# Altium PCB MCH_MAIN.PCBDOC (part 4 of 5)
Units mil, origin at the board's own origin, x right, y up, seen from the top; angles counter-clockwise.
Board outline 7194.88 x 2984.25 mil, 8 copper layers (Top Layer, MidLayer1, MidLayer2, GND, Power, MidLayer3, MidLayer4, Bottom Layer); 584 components, 952 nets, 3896 pads, 365 vias.
Unrouted connection lines stored in the file: 2112.
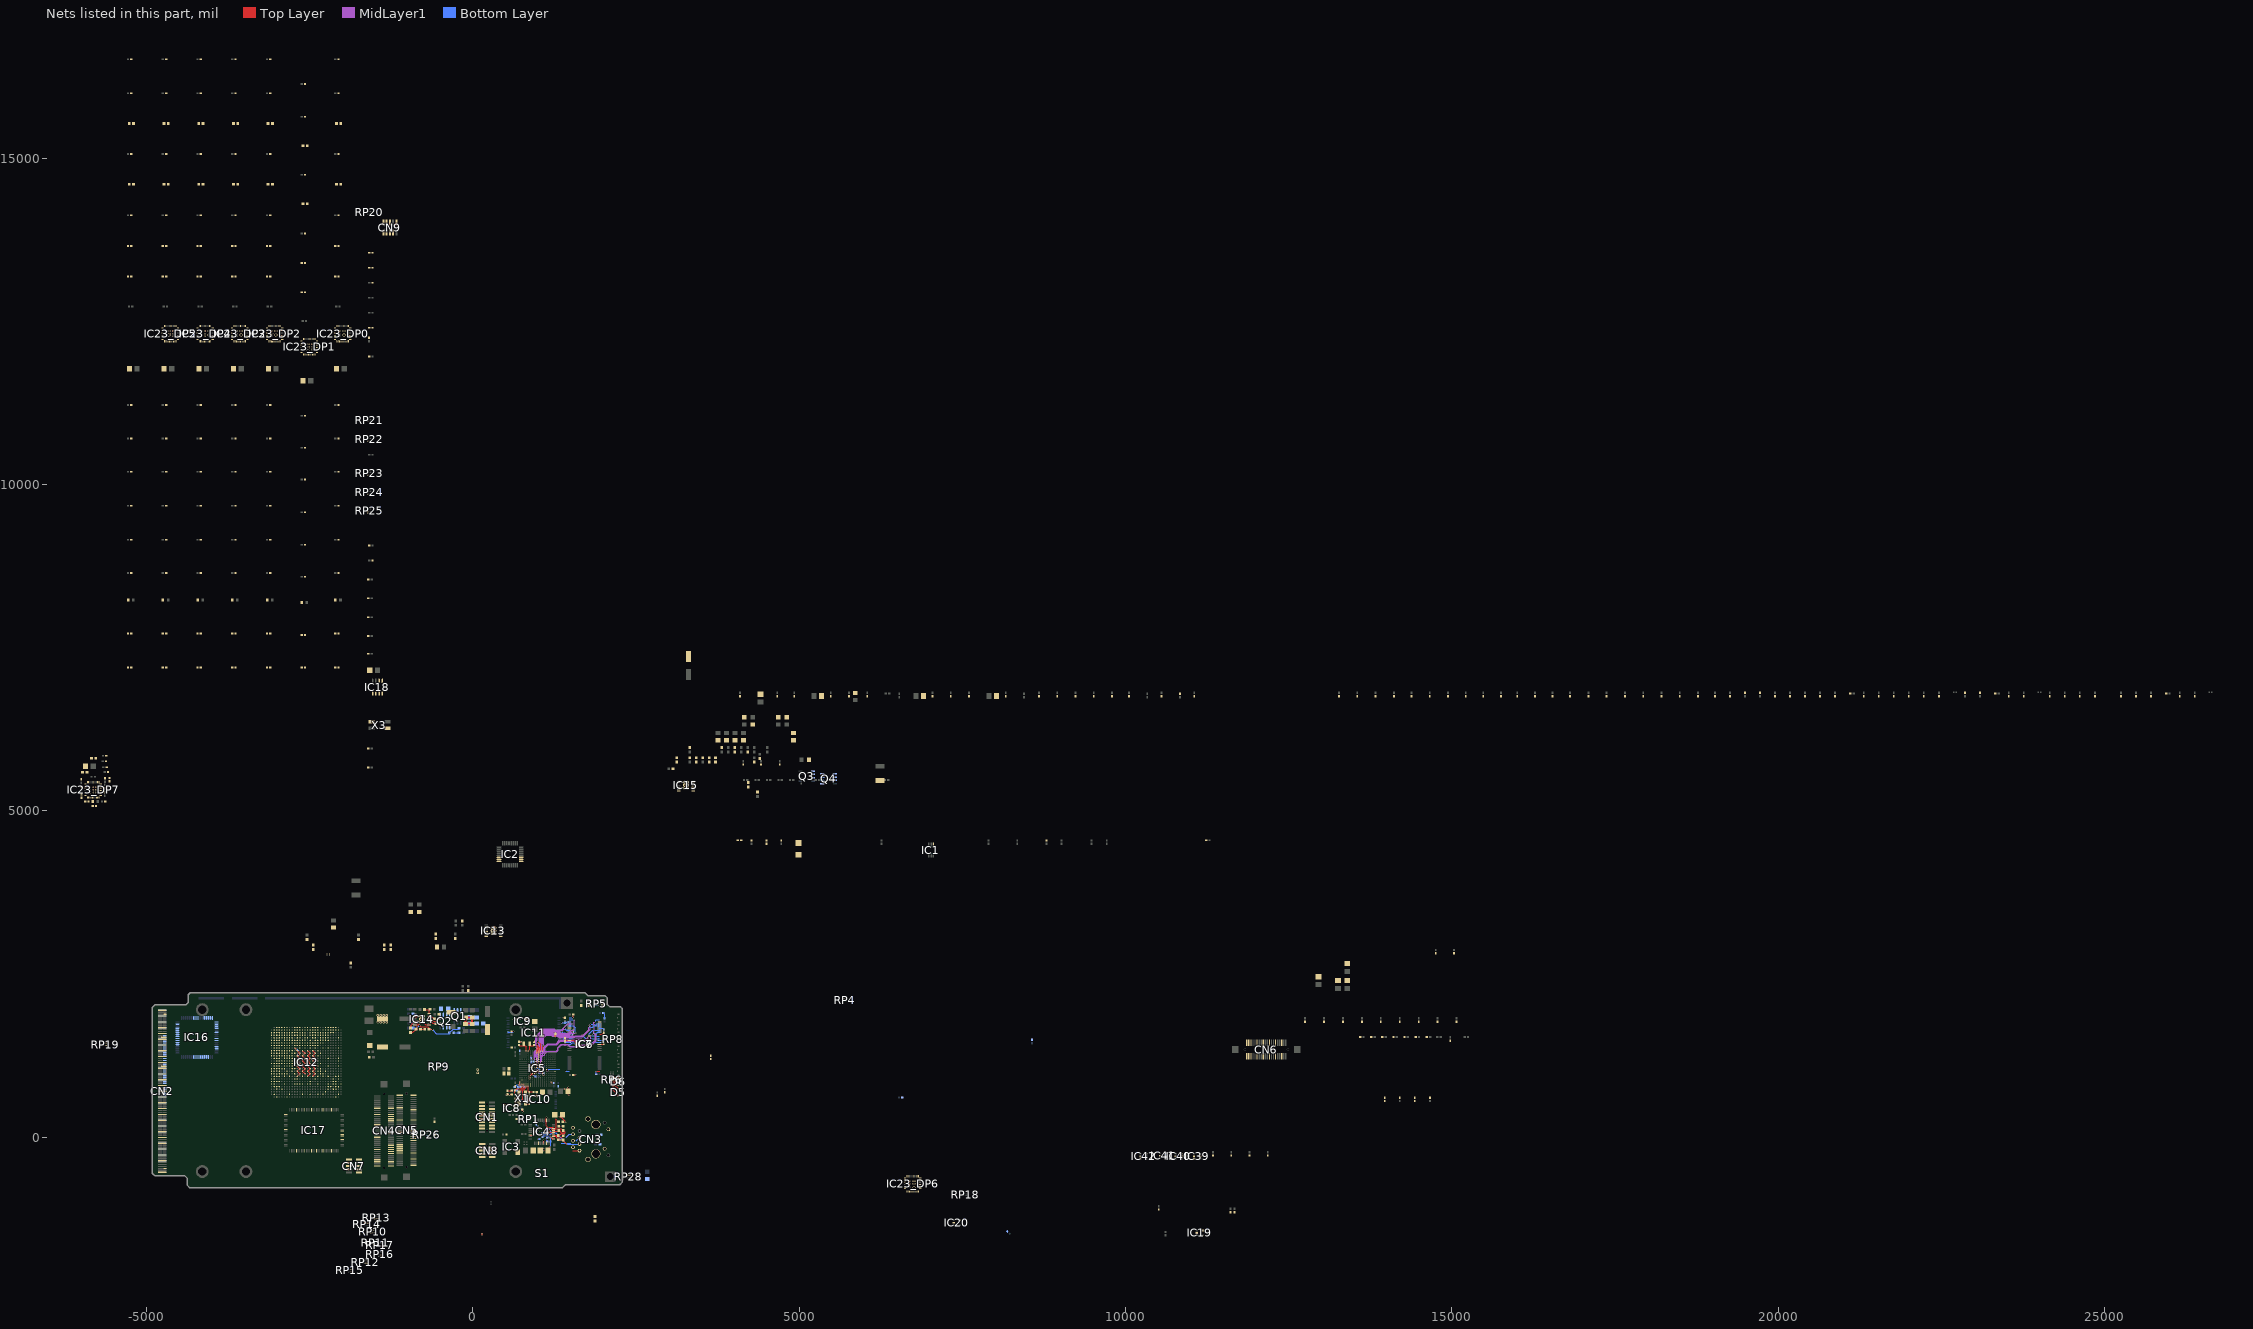
[diagram p7: the nets of this part, all layers, seen from the top]

## Via types
v1: diameter 24, hole 8, Top Layer to Bottom Layer, 183 vias
v2: diameter 18, hole 8, Top Layer to Bottom Layer, 150 vias
v3: diameter 40, hole 24, Top Layer to Bottom Layer, 24 vias
v4: diameter 26, hole 10, Top Layer to Bottom Layer, 8 vias

## Nets (pads, with @x,y where several pads share a name; then routed paths per layer and width w, separated by ;. In a path a pad name is that pad's centre, name@x,y a point inside that pad or via, vN(x,y) a via of type N, cw(c..) or ccw(c..) an arc to the next point about the centre after c; other vN are vias at no path point) (continued)
D16: IC5.H7 IC7.2 | length 1494.2
  Top Layer w8: IC5.H7@1038.37,1132.88 v2(1054.11,1148.63)
  MidLayer1 w5: v2(1054.11,1148.63) 1056.12,1150.63 1056.12,1233.97 1079.63,1257.48 1091.97,1257.48 1101.61,1267.11 1101.61,1281.03 1130.98,1310.41 1284.78,1310.41 1309.59,1335.22 1309.59,1368.56 1359.79,1418.75 1454.75,1418.75 1486.24,1387.26 1629.06,1387.26 1651.29,1409.49 1764.03,1409.49 1773.08,1418.54 1798.69,1418.54 1808.58,1428.44 1836.3,1428.44 1888.75,1480.89 1888.75,1567.96 1873.02,1583.69 1872.62,1583.69 1855.34,1600.97 1855.34,1627.38 1857.26,1629.29 1857.26,1727.37 1855.5,1729.13 1855.5,1761.01 v1(1867.13,1772.64)
  Bottom Layer w5: v1(1867.13,1772.64) 1894.63,1800.14 IC7.2@1940.65,1800.14
D17: IC5.G1 IC7.4 | length 1238.3
  Top Layer w5: IC5.G1@1069.86,1321.86 1069.86,1386.79 v1(1083.66,1400.59)
  MidLayer1 w5: v1(1083.66,1400.59) 1085.82,1402.74 1085.82,1525.79 1122.03,1562.01 1165.35,1562.01 ; 1165.35,1562.17 1205.83,1562.17 1217.19,1550.81 1296.63,1550.81 1325.51,1521.93 ; 1325.79,1521.65 1325.79,1521.93 ; v1(1802.17,1729.33) 1802.17,1658.08 1683.38,1539.3 1569.57,1539.3 1552.2,1521.93 1325.79,1521.93 ; 1325.51,1521.93 1325.79,1521.93 ; 1325.51,1521.93 1325.79,1521.93
  Bottom Layer w5: v1(1802.17,1729.33) 1833.68,1729.33 1845.49,1717.52 1882.89,1717.52 1902.52,1737.15 IC7.4@1940.65,1737.15
D18: IC5.J5 IC7.5 | length 1388.3
  Top Layer w8: IC5.J5@1006.87,1195.87 v2(1022.62,1211.62)
  MidLayer1 w5: v2(1022.62,1211.62) 1022.62,1220.29 998.12,1244.79 998.12,1284.76 1064.16,1350.8 1064.16,1418.27 1075.82,1429.92 1075.82,1529.94 1118.05,1572.17 1209.98,1572.17 1221.34,1560.81 1300.77,1560.81 1323.96,1537.62 1553.75,1537.62 1565.43,1549.3 1679.24,1549.3 1774.61,1644.67 v1(1774.61,1697.83)
  Bottom Layer w5: v1(1774.61,1697.83) 1784.26,1688.18 1835.83,1688.18 1853.31,1705.66 IC7.5@1940.65,1705.66
D19: IC5.J4 IC7.7 | length 1358.3
  Top Layer w8: IC5.J4@1006.87,1227.37 v2(1022.62,1243.12)
  MidLayer1 w5: v2(1022.62,1243.12) 1007.12,1258.62 1007.12,1281.03 1043.68,1317.6 1052.37,1317.6 1089.88,1355.11 1089.88,1376.84 1150.11,1437.07 1277.94,1437.07 1316.36,1475.48 1316.36,1491.93 ; 1475.39,1491.93 1316.36,1491.93 ; v1(1780.51,1552.17) 1780.51,1546.28 1739.53,1505.3 1666.94,1505.3 1662.93,1509.3 1582,1509.3 1564.63,1491.93 1316.36,1491.93
  Bottom Layer w5: v1(1780.51,1552.17) 1782.48,1554.13 1782.48,1588.56 1836.58,1642.66 IC7.7@1940.65,1642.66
D20: IC5.J8 IC7.8 | length 1361
  Top Layer w8: IC5.J8@1006.87,1101.39 v2(1022.62,1117.13)
  MidLayer1 w5: v2(1022.62,1117.13) 1038.61,1133.13 1038.61,1161.47 1047.12,1169.98 1047.12,1245.7 1070.05,1268.63 1070.05,1279.4 1111.06,1320.41 1280.64,1320.41 1299.59,1339.36 1299.59,1372.7 1355.65,1428.75 1458.89,1428.75 1490.38,1397.26 1624.92,1397.26 1647.15,1419.49 1759.88,1419.49 1768.94,1428.54 1794.55,1428.54 1804.44,1438.44 1832.15,1438.44 1878.75,1485.03 1878.75,1556.31 1857.3,1577.76 1851.38,1577.76 v1(1849.41,1575.79)
  Bottom Layer w5: v1(1849.41,1575.79) 1867.31,1593.69 1892.92,1593.69 1904.34,1605.11 1904.34,1607.08 1908.43,1611.17 IC7.8@1940.65,1611.17
D21: IC5.J7 IC7.10 | length 1233.9
  Top Layer w8: IC5.J7@1006.87,1132.88 v2(1022.62,1148.63)
  MidLayer1 w5: v2(1022.62,1148.63) 1022.62,1158.21 1038.12,1173.71 1038.12,1280.54 1047.69,1290.11 1066.43,1290.11 1075.43,1299.11 ; 1073.91,1297.6 1075.43,1299.11 ; v1(1810.04,1554.13) 1810.04,1511.21 1784.13,1485.3 1658.65,1485.3 1654.65,1489.3 1590.28,1489.3 1572.91,1471.93 1341.09,1471.93 1286.23,1417.07 1158.39,1417.07 1111.41,1370.08 1111.41,1335.09 1075.43,1299.11
  Bottom Layer w5: v1(1810.04,1554.13) 1813.79,1557.88 1816.74,1554.93 1817.73,1555.92 1883,1555.92 1890.75,1548.17 IC7.10@1940.65,1548.17
D22: IC5.J3 IC7.11 | length 1061.4
  Top Layer w8: IC5.J3@1006.87,1258.87 v2(1022.62,1274.61)
  MidLayer1 w5: v2(1022.62,1274.61) 1022.62,1277.77 1052.45,1307.6 1061.54,1307.6 1099.88,1345.94 1099.88,1372.7 1154.25,1427.07 1282.08,1427.07 1336.94,1481.93 1568.77,1481.93 1586.14,1499.3 1658.79,1499.3 1662.8,1495.3 1751.87,1495.3 1769.71,1513.15 v1(1784.4,1513.15)
  Bottom Layer w5: v1(1784.4,1513.15) 1937.11,1513.15 IC7.11@1940.65,1516.68
D23: IC5.J6 IC7.13 | length 1397.5
  Top Layer w8: IC5.J6@1006.87,1164.38 v2(1022.62,1180.13)
  MidLayer1 w5: v2(1022.62,1180.13) 993.13,1209.62 993.13,1237.05 988.12,1242.06 988.12,1291.27 1054.16,1357.31 1054.16,1422.41 1065.82,1434.06 1065.82,1534.08 1113.91,1582.17 1214.12,1582.17 1225.48,1570.81 1304.91,1570.81 1328.1,1547.62 1549.61,1547.62 1561.29,1559.3 1661.67,1559.3 v1(1674.21,1571.85)
  Bottom Layer w5: v1(1674.21,1571.85) 1674.21,1560.32 1780.85,1453.69 IC7.13@1940.65,1453.69
D24: IC5.H1 IC7.42 | length 926.2
  Top Layer w5: v1@991.14,1469.49 1038.37,1422.26 IC5.H1@1038.37,1321.86
  MidLayer1 w5: v1@991.14,1469.49 991.14,1544.26 1089.06,1642.17 1238.97,1642.17 1250.33,1630.81 1349.5,1630.81 v1(1363.19,1617.13)
  Bottom Layer w5: v1(1363.19,1617.13) 1390.75,1589.57 1390.75,1473.49 1410.5,1453.74 1477.6,1453.74 IC7.42@1477.65,1453.69 IC7.42@1488.74,1453.69
  other v1: 995.3,1467.95
D25: IC5.K8 IC7.44 | length 1122.4
  Top Layer w8: v2(959.63,1117.13) IC5.K8@975.37,1101.39
  MidLayer1 w5: v2(959.63,1117.13) 984.13,1141.63 984.13,1233.33 978.12,1239.33 978.12,1298.98 1044.16,1365.03 1044.16,1426.55 1055.82,1438.21 1055.82,1538.22 1109.77,1592.17 1218.26,1592.17 1229.62,1580.81 1309.05,1580.81 1332.24,1557.62 1512.35,1557.62 1520.67,1565.94 ; 1526.57,1565.94 1520.67,1565.94 ; v1(1542.32,1567.91) 1540.35,1565.94 1520.67,1565.94
  Bottom Layer w5: IC7.44@1477.65,1516.68 1498.96,1516.68 1516.68,1516.68 1542.32,1542.32 v1(1542.32,1567.91)
D26: IC5.J2 IC7.45 | length 1082.9
  Top Layer w5: v1(993.11,1426.18) 993.11,1430.12 989.17,1434.06 989.17,1406.5 1021.24,1374.42 1021.24,1305.48 1006.87,1291.11 IC5.J2@1006.87,1290.36
  MidLayer1 w5: v1@991.14,1424.21 991.14,1430.1 1015.82,1454.77 1015.82,1554.79 1093.2,1632.17 1234.83,1632.17 1246.19,1620.81 1325.62,1620.81 1348.81,1597.62 1460.19,1597.62 1505.25,1642.69 1522.61,1642.69 v1(1536.42,1656.5)
  Bottom Layer w5: IC7.45@1493.16,1548.17 IC7.45@1477.65,1548.17 1512.74,1548.17 1522.82,1558.26 1522.82,1579.89 1548.04,1605.11 1548.04,1644.87 v1(1536.42,1656.5)
D27: IC5.K5 IC7.47 | length 1013.4
  Top Layer w8: v2(959.63,1211.62) IC5.K5@975.37,1195.87
  MidLayer1 w5: v2(959.63,1211.62) 958.12,1213.13 958.12,1308.87 1024.16,1374.92 1024.16,1434.84 1035.82,1446.49 1035.82,1546.5 1101.49,1612.17 1226.55,1612.17 1237.91,1600.81 1317.34,1600.81 1340.53,1577.62 1468.48,1577.62 1504.04,1613.19 v1@1524.61,1613.19 ; v1@1516.73,1613.19 v1@1524.61,1613.19 ; v1@1526.58,1613.19 v1(1528.54,1613.19) ; v1@1536.42,1613.19 1526.57,1613.19 v1@1524.61,1613.19
  Bottom Layer w5: IC7.47@1477.65,1611.17 v1@1534.39,1611.17
D28: IC5.K2 IC7.48 | length 861.1
  Top Layer w5: v1(963.58,1363.19) 989.75,1337.02 989.75,1304.74 IC5.K2@975.37,1290.36
  MidLayer1 w5: v1@963.58,1365.14 973.63,1375.18 985.05,1386.61 989.17,1390.73 989.17,1402.56 985.05,1406.68 973.61,1418.1 973.61,1540.87 1084.92,1652.17 1243.11,1652.17 1254.47,1640.81 1379,1640.81 1382.87,1644.68 ; 1384.84,1646.65 1382.87,1644.68 ; v1(1406.5,1664.37) 1406.5,1662.4 1403.54,1659.45 1397.64,1659.45 1382.87,1644.68
  Bottom Layer w5: v1(1406.5,1664.37) 1406.5,1662.4 1422.24,1646.65 1437.99,1646.65 1441.93,1642.72 1477.6,1642.72 IC7.48@1477.65,1642.66
D29: IC5.K7 IC7.50 | length 1228.5
  Top Layer w8: v2(959.63,1148.63) IC5.K7@975.37,1132.88
  MidLayer1 w5: v2(959.63,1148.63) 975.13,1164.13 975.13,1229.6 968.12,1236.61 968.12,1304.39 1034.16,1370.43 1034.16,1430.69 1045.82,1442.35 1045.82,1542.36 1105.63,1602.17 1222.4,1602.17 1233.76,1590.81 1313.19,1590.81 1336.38,1567.62 1485.31,1567.62 1511.19,1593.5 1565.94,1593.5 1569.88,1597.44 v1(1577.76,1597.44)
  Bottom Layer w5: IC7.50@1477.65,1705.66 1542.39,1705.66 1568.04,1680.01 1568.04,1607.15 v1(1577.76,1597.44)
D30: IC5.J1 IC7.51 | length 957.8
  Top Layer w5: v1(965.55,1394.68) 969.49,1398.62 1006.87,1361.24 IC5.J1@1006.87,1321.86
  MidLayer1 w5: v1(965.55,1394.68) 963.61,1396.63 963.61,1545.01 1080.78,1662.17 1247.26,1662.17 1258.62,1650.81 1365.4,1650.81 1382.69,1668.1 ; 1382.69,1668.14 1451.75,1737.2 v1(1530.51,1737.2)
  Bottom Layer w5: IC7.51@1477.65,1737.15 IC7.51@1477.65,1737.15 v1(1530.51,1737.2)
D31: IC5.K6 IC7.53 | length 1256.7
  Top Layer w8: v2(959.63,1180.13) IC5.K6@975.37,1164.38
  MidLayer1 w5: v2(959.63,1180.13) 944.13,1195.63 944.13,1312.24 1014.16,1382.27 1014.16,1438.98 1025.82,1450.63 1025.82,1550.65 1097.34,1622.17 1230.69,1622.17 1242.05,1610.81 1321.48,1610.81 1344.67,1587.62 1464.33,1587.62 1509.4,1632.69 1540.19,1632.69 1555.92,1648.42 1555.92,1786.6 1546.26,1796.26 v1(1546.26,1800.2)
  Bottom Layer w5: IC7.53@1477.65,1800.14 1477.71,1800.2 v1(1546.26,1800.2)
DBG_RXD: CN8.4 IC5.A11
DBG_TXD: CN8.6 IC5.E10 | length 211.9
  Top Layer w8: IC5.E10@1132.85,1038.39 v2(1148.6,1022.65)
  Bottom Layer w5: v2(1148.6,1022.65) 1166.05,1040.09 1330.99,1040.09
DMTDCLK_MAIN+: CN4.21 IC12.AG15 R57.1
DMTDCLK_MAIN-: CN4.23 IC12.AH15 R57.2
DP0_RD0: IC12.F4 IC23_DP0.29
DP0_RD1: IC12.H6 IC23_DP0.28
DP0_RD2: IC12.G4 IC23_DP0.27
DP0_RD3: IC12.G3 IC23_DP0.25
DP0_RD4: IC12.H4 IC23_DP0.24
DP0_RD5: IC12.H3 IC23_DP0.23
DP0_RD6: IC12.E2 IC23_DP0.22
DP0_RD7: IC12.E1 IC23_DP0.21
DP0_RD8: IC12.F2 IC23_DP0.20
DP0_RD9: IC12.F1 IC23_DP0.19
DP0_TD0: IC12.D3 IC23_DP0.2
DP0_TD1: IC12.C2 IC23_DP0.3
DP0_TD2: IC12.D2 IC23_DP0.4
DP0_TD3: IC12.D1 IC23_DP0.5
DP0_TD4: IC12.H7 IC23_DP0.7
DP0_TD5: IC12.G6 IC23_DP0.8
DP0_TD6: IC12.G5 IC23_DP0.9
DP0_TD7: IC12.E3 IC23_DP0.10
DP0_TD8: IC12.F3 IC23_DP0.11
DP0_TD9: IC12.F5 IC23_DP0.12
DP1_RD0: IC12.J5 IC23_DP1.29
DP1_RD1: IC12.J7 IC23_DP1.28
DP1_RD2: IC12.K7 IC23_DP1.27
DP1_RD3: IC12.K8 IC23_DP1.25
DP1_RD4: IC12.L8 IC23_DP1.24
DP1_RD5: IC12.M5 IC23_DP1.23
DP1_RD6: IC12.L7 IC23_DP1.22
DP1_RD7: IC12.L6 IC23_DP1.21
DP1_RD8: IC12.N4 IC23_DP1.20
DP1_RD9: IC12.N3 IC23_DP1.19
DP1_TD0: IC12.G1 IC23_DP1.2
DP1_TD1: IC12.K2 IC23_DP1.3
DP1_TD2: IC12.K1 IC23_DP1.4
DP1_TD3: IC12.K4 IC23_DP1.5
DP1_TD4: IC12.K3 IC23_DP1.7
DP1_TD5: IC12.L4 IC23_DP1.8
DP1_TD6: IC12.L3 IC23_DP1.9
DP1_TD7: IC12.M4 IC23_DP1.10
DP1_TD8: IC12.M3 IC23_DP1.11
DP1_TD9: IC12.J6 IC23_DP1.12
DP2_RD0: IC12.R3 IC23_DP2.29
DP2_RD1: IC12.R4 IC23_DP2.28
DP2_RD2: IC12.T4 IC23_DP2.27
DP2_RD3: IC12.T3 IC23_DP2.25
DP2_RD4: IC12.R5 IC23_DP2.24
DP2_RD5: IC12.T7 IC23_DP2.23
DP2_RD6: IC12.U2 IC23_DP2.22
DP2_RD7: IC12.U1 IC23_DP2.21
DP2_RD8: IC12.V4 IC23_DP2.20
DP2_RD9: IC12.V3 IC23_DP2.19
DP2_TD0: IC12.M1 IC23_DP2.2
DP2_TD1: IC12.P2 IC23_DP2.3
DP2_TD2: IC12.P1 IC23_DP2.4
DP2_TD3: IC12.N8 IC23_DP2.5
DP2_TD4: IC12.R2 IC23_DP2.7
DP2_TD5: IC12.R1 IC23_DP2.8
DP2_TD6: IC12.R7 IC23_DP2.9
DP2_TD7: IC12.R6 IC23_DP2.10
DP2_TD8: IC12.U3 IC23_DP2.11
DP2_TD9: IC12.U4 IC23_DP2.12
DP3_RD0: IC12.AD1 IC23_DP3.29
DP3_RD1: IC12.AB3 IC23_DP3.28
DP3_RD2: IC12.T8 IC23_DP3.27
DP3_RD3: IC12.AA4 IC23_DP3.25
DP3_RD4: IC12.AA3 IC23_DP3.24
DP3_RD5: IC12.U7 IC23_DP3.23
DP3_RD6: IC12.U8 IC23_DP3.22
DP3_RD7: IC12.AE2 IC23_DP3.21
DP3_RD8: IC12.AE1 IC23_DP3.20
DP3_RD9: IC12.V6 IC23_DP3.19
DP3_TD0: IC12.W1 IC23_DP3.2
DP3_TD1: IC12.U6 IC23_DP3.3
DP3_TD2: IC12.U5 IC23_DP3.4
DP3_TD3: IC12.Y4 IC23_DP3.5
DP3_TD4: IC12.Y3 IC23_DP3.7
DP3_TD5: IC12.AC2 IC23_DP3.8
DP3_TD6: IC12.AC1 IC23_DP3.9
DP3_TD7: IC12.AC3 IC23_DP3.10
DP3_TD8: IC12.AD3 IC23_DP3.11
DP3_TD9: IC12.AD2 IC23_DP3.12
DP4_RD0: IC12.AF2 IC23_DP4.29
DP4_RD1: IC12.AC5 IC23_DP4.28
DP4_RD2: IC12.AC4 IC23_DP4.27
DP4_RD3: IC12.AB6 IC23_DP4.25
DP4_RD4: IC12.AB5 IC23_DP4.24
DP4_RD5: IC12.AD5 IC23_DP4.23
DP4_RD6: IC12.AE6 IC23_DP4.22
DP4_RD7: IC12.AD4 IC23_DP4.21
DP4_RD8: IC12.AF4 IC23_DP4.20
DP4_RD9: IC12.AE4 IC23_DP4.19
DP4_TD0: IC12.Y6 IC23_DP4.2
DP4_TD1: IC12.Y5 IC23_DP4.3
DP4_TD2: IC12.W7 IC23_DP4.4
DP4_TD3: IC12.W8 IC23_DP4.5
DP4_TD4: IC12.Y7 IC23_DP4.7
DP4_TD5: IC12.AA6 IC23_DP4.8
DP4_TD6: IC12.AA5 IC23_DP4.9
DP4_TD7: IC12.AA7 IC23_DP4.10
DP4_TD8: IC12.AB4 IC23_DP4.11
DP4_TD9: IC12.AE3 IC23_DP4.12
DP5_RD0: IC12.AB8 IC23_DP5.29
DP5_RD1: IC12.AD10 IC23_DP5.28
DP5_RD2: IC12.AG7 IC23_DP5.27
DP5_RD3: IC12.AH7 IC23_DP5.25
DP5_RD4: IC12.AB7 IC23_DP5.24
DP5_RD5: IC12.AC8 IC23_DP5.23
DP5_RD6: IC12.AA8 IC23_DP5.22
DP5_RD7: IC12.AA10 IC23_DP5.21
DP5_RD8: IC12.AG8 IC23_DP5.20
DP5_RD9: IC12.AH8 IC23_DP5.19
DP5_TD0: IC12.AF3 IC23_DP5.2
DP5_TD1: IC12.AF6 IC23_DP5.3
DP5_TD2: IC12.Y10 IC23_DP5.4
DP5_TD3: IC12.AG4 IC23_DP5.5
DP5_TD4: IC12.AH4 IC23_DP5.7
DP5_TD5: IC12.AD8 IC23_DP5.8
DP5_TD6: IC12.AC7 IC23_DP5.9
DP5_TD7: IC12.AG6 IC23_DP5.10
DP5_TD8: IC12.AH6 IC23_DP5.11
DP5_TD9: IC12.AB9 IC23_DP5.12
DP6_RD0: IC12.AB10 IC23_DP6.29
DP6_RD1: IC12.AC10 IC23_DP6.28
DP6_RD2: IC12.AG11 IC23_DP6.27
DP6_RD3: IC12.AH11 IC23_DP6.25
DP6_RD4: IC12.AE13 IC23_DP6.24
DP6_RD5: IC12.AF13 IC23_DP6.23
DP6_RD6: IC12.AC12 IC23_DP6.22
DP6_RD7: IC12.AB12 IC23_DP6.21
DP6_RD8: IC12.AB13 IC23_DP6.20
DP6_RD9: IC12.AD12 IC23_DP6.19
DP6_TD0: IC12.AE9 IC23_DP6.2
DP6_TD1: IC12.AB11 IC23_DP6.3
DP6_TD2: IC12.AE10 IC23_DP6.4
DP6_TD3: IC12.AF10 IC23_DP6.5
DP6_TD4: IC12.AG10 IC23_DP6.7
DP6_TD5: IC12.AH10 IC23_DP6.8
DP6_TD6: IC12.AE12 IC23_DP6.9
DP6_TD7: IC12.AF12 IC23_DP6.10
DP6_TD8: IC12.AE11 IC23_DP6.11
DP6_TD9: IC12.AF11 IC23_DP6.12
DP7_RD0: IC12.Y15 IC23_DP7.29
DP7_RD1: IC12.AC15 IC23_DP7.28
DP7_RD2: IC12.AD15 IC23_DP7.27
DP7_RD3: IC12.AE15 IC23_DP7.25
DP7_RD4: IC12.AF15 IC23_DP7.24
DP7_RD5: IC12.AG17 IC23_DP7.23
DP7_RD6: IC12.AH17 IC23_DP7.22
DP7_RD7: IC12.AE16 IC23_DP7.21
DP7_RD8: IC12.AF16 IC23_DP7.20
DP7_RD9: IC12.AA16 IC23_DP7.19
DP7_TD0: IC12.AA12 IC23_DP7.2
DP7_TD1: IC12.Y13 IC23_DP7.3
DP7_TD2: IC12.AA13 IC23_DP7.4
DP7_TD3: IC12.AA14 IC23_DP7.5
DP7_TD4: IC12.AB14 IC23_DP7.7
DP7_TD5: IC12.AG12 IC23_DP7.8
DP7_TD6: IC12.AH12 IC23_DP7.9
DP7_TD7: IC12.AC14 IC23_DP7.10
DP7_TD8: IC12.AD14 IC23_DP7.11
DP7_TD9: IC12.Y14 IC23_DP7.12
DP_ENABLE0: IC12.J3 IC23_DP0.1
DP_ENABLE1: IC12.L1 IC23_DP1.1
DP_ENABLE2: IC12.AB1 IC23_DP2.1
DP_ENABLE3: IC12.W4 IC23_DP3.1
DP_ENABLE4: IC12.AF5 IC23_DP4.1
DP_ENABLE5: IC12.AE8 IC23_DP5.1
DP_ENABLE6: IC12.AD11 IC23_DP6.1
DP_ENABLE7: IC12.AE17 IC23_DP7.1
DP_LOOPEN0: IC12.L5 IC23_DP0.15
DP_LOOPEN1: IC12.M7 IC23_DP1.15
DP_LOOPEN2: IC12.V1 IC23_DP2.15
DP_LOOPEN3: IC12.V8 IC23_DP3.15
DP_LOOPEN4: IC12.AD7 IC23_DP4.15
DP_LOOPEN5: IC12.AF7 IC23_DP5.15
DP_LOOPEN6: IC12.AF14 IC23_DP6.15
DP_LOOPEN7: IC12.AA15 IC23_DP7.15
DP_PRBSEN0: IC12.H5 IC23_DP0.31
DP_PRBSEN1: IC12.M8 IC23_DP1.31
DP_PRBSEN2: IC12.V2 IC23_DP2.31
DP_PRBSEN3: IC12.V5 IC23_DP3.31
DP_PRBSEN4: IC12.AG3 IC23_DP4.31
DP_PRBSEN5: IC12.AE7 IC23_DP5.31
DP_PRBSEN6: IC12.AE14 IC23_DP6.31
DP_PRBSEN7: IC12.AB16 IC23_DP7.31
DP_SYNC_PASS0: IC12.G2 IC23_DP0.30
DP_SYNC_PASS1: IC12.M2 IC23_DP1.30
DP_SYNC_PASS2: IC12.W2 IC23_DP2.30
DP_SYNC_PASS3: IC12.W3 IC23_DP3.30
DP_SYNC_PASS4: IC12.AH3 IC23_DP4.30
DP_SYNC_PASS5: IC12.AF8 IC23_DP5.30
DP_SYNC_PASS6: IC12.Y12 IC23_DP6.30
DP_SYNC_PASS7: IC12.AF17 IC23_DP7.30
DP_SYNCEN0: IC12.J4 IC23_DP0.32
DP_SYNCEN1: IC12.L2 IC23_DP1.32
DP_SYNCEN2: IC12.AB2 IC23_DP2.32
DP_SYNCEN3: IC12.V7 IC23_DP3.32
DP_SYNCEN4: IC12.AE5 IC23_DP4.32
DP_SYNCEN5: IC12.AF9 IC23_DP5.32
DP_SYNCEN6: IC12.AC11 IC23_DP6.32
DP_SYNCEN7: IC12.AB15 IC23_DP7.32
EBI1_A21: IC5.M9 | length 22.3
  Top Layer w8: v2(896.63,1085.64) IC5.M9@912.38,1069.89
EBI1_A22: IC5.N9 | length 22.3
  Top Layer w8: v2(865.14,1085.64) IC5.N9@880.89,1069.89
EEPROM_SCL: IC16.29 IC18.6 RP20.6
EEPROM_SDA: IC16.30 IC18.5 RP20.5
ETH100_AGND: C9.1 C10.1 C11.2 C12.2 C13.1 C16.1 C18.1 C20.1 IC4.5 IC4.6 IC4.46 R14.2 | length 561.4
  Top Layer w8: v1(1089.57,-202.76) 1088.39,-201.57 C12.2@1033.23,-201.57 1069.45,-165.35 v1(1089.57,-165.35) ; v1(1116.14,145.67) 1140.75,121.06 v1(1140.75,107.28) 1174.09,73.94 IC4.6@1235.12,73.94 IC4.5@1235.12,53.94 ; v1(1324.8,313.98) 1350.79,313.98 1381.34,283.43 1420.28,244.49 v1(1420.28,232.28)
  Bottom Layer w8: C10.1@1140.63,76.42 C18.1@1140.63,136.42
  Bottom Layer w12: C13.1@1140.63,-63.58 C16.1@1140.63,-3.58
  other v1: 1140.75,-31.5 1115.16,-3.94
EXT_TCK: CN7.6 R51.2
EXT_TDI: CN7.8 R53.2
EXT_TDO: CN7.10 R55.2
EXT_TMS: CN7.4 R49.2
FBOOT_SEL: IC8.1 IC16.9
FMAIN_SEL: IC9.1 IC16.8
FPGA_REFCLK: IC12.B14 R10.1
FRU_SCL: CN2.130 IC16.18 RP24.8
FRU_SDA: CN2.129 IC16.19 RP24.7
GND: C1.1 C2.1 C3.1 C4.1 C5.1 C6.1 C7.1 C8.2 C14.2 C15.2 C17.2 C19.2 C21.2 C22.2 C23.2 C24.2 C25.2 C26.2 C27.2 C28.2 C29.2 C30.2 C31.2 C32.1 C33.2 C34.2 C35.2 C36.2 C37.2 C38.2 C39.2 C40.2 C41.2 C42.2 C43.2 C44.2 C45.2 C46.2 C47.2 C48.2 C49.2 C50.2 C51.2 C52.2 C53.2 C54.2 C55.2 C56.2 C57.2 C58.2 C59.2 C60.2 C63_DP0.1 C63_DP1.1 C63_DP2.1 C63_DP3.1 C63_DP4.1 C63_DP5.1 C63_DP6.1 C63_DP7.1 C64_DP0.1 C64_DP1.1 C64_DP2.1 C64_DP3.1 C64_DP4.1 C64_DP5.1 C64_DP6.1 C64_DP7.1 C65.1 C66.1 C67.1 C68.1 C69.1 C70.1 C71.1 C72.1 C73.1 C74.1 C75.1 C76.1 C77.1 C78.1 C79_DP0.2 C79_DP1.2 C79_DP2.2 C79_DP3.2 C79_DP4.2 C79_DP5.2 C79_DP6.2 C79_DP7.2 C80.1 C81.1 C82.2 C83.2 C84.1 C85.1 C86.1 C87.1 C88.1 C89.1 C90.1 C91.1 C92.1 C93.1 C94.1 C95.1 C96.2 C97.2 C98.1 C99.1 C100.1 C101.1 C102.1 C103.1 C104.1 C105.1 C106.1 C107.1 C110.1 C111.1 C112.1 C113.1 C114.1 C115.1 C116.1 C117.1 C118_DP0.1 C118_DP1.1 C118_DP2.1 C118_DP3.1 C118_DP4.1 C118_DP5.1 C118_DP6.1 C118_DP7.1 C119_DP0.1 C119_DP1.1 C119_DP2.1 C119_DP3.1 C119_DP4.1 C119_DP5.1 C119_DP6.1 C119_DP7.1 C120_DP0.1 C120_DP1.1 C120_DP2.1 C120_DP3.1 C120_DP4.1 C120_DP5.1 C120_DP6.1 C120_DP7.1 C121_DP0.1 C121_DP1.1 C121_DP2.1 C121_DP3.1 C121_DP4.1 C121_DP5.1 C121_DP6.1 C121_DP7.1 C122_DP0.1 C122_DP1.1 C122_DP2.1 C122_DP3.1 C122_DP4.1 C122_DP5.1 C122_DP6.1 C122_DP7.1 C123_DP0.1 C123_DP1.1 C123_DP2.1 C123_DP3.1 C123_DP4.1 C123_DP5.1 C123_DP6.1 C123_DP7.1 C124_DP0.1 C124_DP1.1 C124_DP2.1 C124_DP3.1 C124_DP4.1 C124_DP5.1 C124_DP6.1 C124_DP7.1 C125_DP0.1 C125_DP1.1 C125_DP2.1 C125_DP3.1 C125_DP4.1 C125_DP5.1 C125_DP6.1 C125_DP7.1 C126.1 C127.1 C128.1 C129.1 C130.1 C131.1 C132.1 C133.1 C134.1 C135.1 C136.1 C137.1 C138.1 C139.1 C140.1 C141.1 C142.1 C143.1 C144.1 C145.1 C146.1 C147.2 C148.1 C149.1 C150.1 C151.1 C152.1 C153.1 C154.1 C155.2 C156.1 C157.1 C158.1 C159.2 C160.1 C161.1 C162.2 C163.1 C164.1 C165.1 C167.1 C168.1 C169.1 C170.1 C171.1 C172.1 C175.2 C176.2 C177.2 C178.2 C179.2 C181.1 C183.1 C184.1 C185.1 C186.1 C187.1 C188.1 C190.2 C191.1 C192.1 C197.1 C199.2 C201.1 C202.1 C203.1 C204.1 C205.1 C207.2 C208.2 C209.2 C210.2 C211.2 C213.2 C214.2 C215.2 C217.2 C221.2 C222.2 C223.2 C224.2 C225.2 C226.2 C227.2 C228.2 C229.1 C230.1 C231.1 C232.1 C233.1 C234.1 C235.1 C236.1 C237.1 C238.1 C239.1 C240.1 C241.2 C242.2 C243.2 C244.2 C245.2 C246.2 C247.2 C249.2 C250.1 C251.1 C252.2 CN1.4 CN1.6 CN1.8 CN1.10 CN1.12 CN1.14 CN1.16 CN1.18 CN1.20 CN2.1 CN2.7 CN2.10 CN2.13 CN2.16 CN2.19 CN2.22 CN2.25 CN2.28 CN2.31 CN2.34 CN2.37 CN2.40 CN2.43 CN2.46 CN2.49 CN2.52 CN2.55 CN2.58 CN2.61 CN2.64 CN2.67 CN2.70 CN2.73 CN2.76 CN2.79 CN2.82 CN2.85 CN2.86 CN2.89 CN2.92 CN2.95 CN2.98 CN2.101 CN2.104 CN2.107 CN2.110 CN2.113 CN2.116 CN2.119 CN2.122 CN2.125 CN2.128 CN2.131 CN2.134 CN2.137 CN2.140 CN2.143 CN2.146 CN2.149 CN2.152 CN2.155 CN2.158 CN2.161 CN2.164 CN3.0a CN3.0b CN3.0c CN3.0d CN3.8 CN4.13 CN4.14 CN4.19 CN4.20 CN4.25 CN4.30 CN4.37 CN4.42 CN4.49 CN4.54 CN4.57 CN4.65 CN4.66 CN4.69 CN4.70 CN5.1 CN5.2 CN5.14 CN5.15 CN5.25 CN5.26 CN5.35 CN5.38 CN5.45 CN5.50 CN5.57 CN5.58 CN5.63 CN6.5 CN6.6 CN6.11 CN6.12 CN6.17 CN6.18 CN6.23 CN6.24 CN6.29 CN6.30 CN6.35 CN6.36 CN6.37 CN6.38 CN6.39 CN6.40 CN7.1 CN7.3 CN7.5 CN7.7 CN7.9 CN8.1 CN8.3 CN8.5 CN8.7 CN8.8 CN8.9 CN8.10 CN9.4 CN9.6 CN9.8 CN9.10 CN10.2 D14.1 D15.2 D16.2 D17.A D18.1 D19.2 IC1.5 IC2.6 IC2.7 IC2.8 IC2.17 IC2.18 IC2.19 IC3.2 IC4.10 IC4.15 IC4.33 IC4.44 IC5.C16 IC5.G8 IC5.G10 IC5.G11 IC5.G12 IC5.H9 IC5.H11 IC5.J9 IC5.J10 IC5.J11 IC5.K9 IC5.K11 IC5.L12 IC5.M11 IC5.M12 IC5.N13 IC5.N14 IC5.T17 IC5.V16 IC5.V17 IC6.6 IC6.12 IC6.28 IC6.41 IC6.46 IC6.52 IC6.54 IC7.6 IC7.12 IC7.28 IC7.41 IC7.46 IC7.52 IC7.54 IC8.3 IC9.3 IC10.7 IC11.13 IC11.36 IC11.38 IC12.AA2 IC12.AA9 IC12.AA20 IC12.AA27 IC12.AC6 IC12.AC9 IC12.AC13 IC12.AC16 IC12.AC20 IC12.AC23 IC12.AF1 IC12.AF28 IC12.AG2 IC12.AG5 IC12.AG9 IC12.AG13 IC12.AG16 IC12.AG20 IC12.AG24 IC12.AG27 IC12.B2 IC12.B5 IC12.B9 IC12.B13 IC12.B16 IC12.B20 IC12.B24 IC12.B27 IC12.C1 IC12.C28 IC12.F6 IC12.F9 IC12.F13 IC12.F16 IC12.F20 IC12.F23 IC12.H2 IC12.H9 IC12.H20 IC12.H27 IC12.J11 IC12.J18 IC12.K6 IC12.K10 IC12.K12 IC12.K14 IC12.K16 IC12.K18 IC12.K20 IC12.K23 IC12.L9 IC12.L11 IC12.L13 IC12.L15 IC12.L17 IC12.L19 IC12.M10 IC12.M12 IC12.M14 IC12.M16 IC12.M18 IC12.M20 IC12.N2 IC12.N6 IC12.N9 IC12.N11 IC12.N13 IC12.N15 IC12.N17 IC12.N19 IC12.N22 IC12.N23 IC12.N27 IC12.P10 IC12.P12 IC12.P14 IC12.P16 IC12.P18 IC12.P20 IC12.P23 IC12.R8 IC12.R9 IC12.R11 IC12.R13 IC12.R15 IC12.R17 IC12.R19 IC12.T2 IC12.T6 IC12.T10 IC12.T12 IC12.T14 IC12.T16 IC12.T18 IC12.T20 IC12.T23 IC12.T27 IC12.U9 IC12.U11 IC12.U13 IC12.U15 IC12.U17 IC12.U19 IC12.V10 IC12.V12 IC12.V14 IC12.V16 IC12.V18 IC12.V20 IC12.W6 IC12.W9 IC12.W11 IC12.W13 IC12.W15 IC12.W17 IC12.W19 IC12.W23 IC12.Y11 IC12.Y18 IC13.5 IC13.10 IC13.11 IC13.15 IC13.16 IC13.PAD IC14.9 IC14.PAD IC15.9 IC15.PAD IC16.22 IC16.53 IC16.63 IC17.5 IC17.10 IC17.17 IC17.21 IC17.26 IC17.40 IC17.55 IC17.60 IC17.64 IC17.67 IC17.71 IC17.76 IC17.90 IC17.92 IC17.98 IC18.1 IC18.2 IC18.3 IC18.4 IC19.2 IC20.2 IC23_DP0.35 IC23_DP0.40 IC23_DP0.PAD IC23_DP1.35 IC23_DP1.40 IC23_DP1.PAD IC23_DP2.35 IC23_DP2.40 IC23_DP2.PAD IC23_DP3.35 IC23_DP3.40 IC23_DP3.PAD IC23_DP4.35 IC23_DP4.40 IC23_DP4.PAD IC23_DP5.35 IC23_DP5.40 IC23_DP5.PAD IC23_DP6.35 IC23_DP6.40 IC23_DP6.PAD IC23_DP7.35 IC23_DP7.40 IC23_DP7.PAD IC39.2 IC39.3 IC39.5 IC40.2 IC40.5 IC41.2 IC42.2 IC42.3 Q2.1 Q2.2 Q2.3 Q4.1 Q4.2 Q4.3 R14.1 R18.2 R33.2 R38.2 R63.2 R79.2 R82.2 R90.2 R91.2 RP1.5 RP1.6 RP1.7 RP1.8 S1.A S1.C X1.2 X1.4 X3.2 X3.4 | length 6627.1
  Top Layer w8: IC12.W9@-2727.64,1366.81 IC12.V10@-2688.27,1327.44 IC12.U11@-2648.9,1288.07 IC12.V12@-2688.27,1248.7 IC12.U13@-2648.9,1209.33 IC12.V14@-2688.27,1169.96 IC12.U15@-2648.9,1130.59 IC12.V16@-2688.27,1091.22 IC12.U17@-2648.9,1051.85 IC12.V18@-2688.27,1012.48 IC12.U19@-2648.9,973.11 IC12.V20@-2688.27,933.74 ; IC12.T10@-2609.53,1327.44 IC12.R11@-2570.16,1288.07 IC12.T12@-2609.53,1248.7 IC12.R13@-2570.16,1209.33 IC12.T14@-2609.53,1169.96 IC12.R15@-2570.16,1130.59 IC12.T16@-2609.53,1091.22 IC12.R17@-2570.16,1051.85 IC12.T18@-2609.53,1012.48 IC12.R19@-2570.16,973.11 ; IC12.P20@-2530.79,933.74 IC12.N19@-2491.42,973.11 IC12.P18@-2530.79,1012.48 IC12.N17@-2491.42,1051.85 IC12.P16@-2530.79,1091.22 IC12.N15@-2491.42,1130.59 IC12.P14@-2530.79,1169.96 IC12.N13@-2491.42,1209.33 IC12.P12@-2530.79,1248.7 IC12.N11@-2491.42,1288.07 ; IC12.P10@-2530.79,1322.56 IC12.P10@-2530.79,1327.44 IC12.N11@-2491.42,1288.07 ; IC12.N11@-2494.41,1288.07 IC12.N11@-2491.42,1288.07 ; IC12.M20@-2452.05,933.74 IC12.L19@-2412.68,973.11 IC12.M18@-2452.05,1012.48 IC12.L17@-2412.68,1051.85 IC12.M16@-2452.05,1091.22 IC12.L15@-2412.68,1130.59 IC12.M14@-2452.05,1169.96 IC12.L13@-2412.68,1209.33 IC12.M12@-2452.05,1248.7 IC12.L11@-2412.68,1288.07 ; IC12.M10@-2452.05,1322.56 IC12.M10@-2452.05,1327.44 IC12.L11@-2412.68,1288.07 ; IC12.L11@-2415.67,1288.07 IC12.L11@-2412.68,1288.07 ; C57.2@490.43,481.69 490.43,508.15 v1(498.03,515.75) ; v1(511.81,654.53) 517.8,660.51 C31.2@530.43,660.51 534.84,656.1 C34.2@594.84,656.1 ; C60.2@601.69,1625.83 605.47,1622.05 v1(625,1622.05) ; v1(621.34,1805.83) C43.2@651.69,1805.83 ; IC8.3@642.68,483.5 669.84,510.67 v1@669.84,521.1 ; C38.2@650.43,540.51 v1@669.84,521.1 ; v1(704.72,569.88) 704.72,527.32 X1.4@710.94,521.1 v1@669.84,521.1 ; v2(707.66,802.17) IC5.V17@723.41,817.92 ; C40.2@711.69,1455.83 732.4,1455.83 v1(739.17,1462.6) ; IC5.V17@723.41,817.92 IC5.V16@723.41,849.42 ; IC5.V17@723.41,817.92 723.43,832.53 ; C56.2@756.02,426.1 756.02,404.41 v1(764.76,395.67) ; v2(770.65,802.17) IC5.T17@786.4,817.92 ; X1.2@805.43,678.58 805.43,632.56 v1(807.09,630.91) ; IC9.3@813.94,1812.64 844.13,1812.64 v1(844.49,1812.99) ; v2(865.14,896.66) IC5.N14@880.89,912.41 ; v2@865.16,928.15 896.63,959.63 IC5.M12@912.38,975.4 ; C36.2@865.43,561.69 865.43,594.76 v1(866.14,595.47) ; IC4.33@881.12,33.94 927.64,33.94 v1(928.15,34.45) ; v2(896.63,991.15) IC5.M11@912.38,1006.9 ; v2(928.13,959.65) IC5.L12@943.88,975.4 959.63,991.12 ; C41.2@931.69,1450.83 v1(931.69,1478.94) ; 959.63,991.15 IC5.K11@975.37,1006.9 ; v2(959.63,1085.64) IC5.K9@975.37,1069.89 ; v1@981.02,618.39 C29.2@981.02,696.1 ; v2(992.11,1085.64) 992.13,1084.63 IC5.J9@1006.87,1069.89 IC5.H9@1038.37,1069.89 ; IC5.J11@1006.87,1006.9 IC5.J10@1006.87,1038.39 ; IC5.J11@1006.87,1006.9 IC5.H11@1038.37,1006.9 v2@1054.12,991.16 ; IC5.H9@1038.37,1069.89 IC5.G8@1069.86,1101.39 ; IC5.G12@1069.86,975.4 v2(1085.63,959.65) ; IC5.G10@1069.86,1038.39 1072.11,1036.14 1072.11,1015.19 1069.88,1012.96 IC5.G12@1069.86,975.4 ; IC5.G8@1069.86,1101.39 1084.65,1116.17 v2@1084.65,1117.13 ; v1@1080.71,-48.23 1088.12,-55.64 IC4.44@1088.12,-93.06 ; v1(1130.91,305.12) 1128.12,302.33 IC4.15@1128.12,260.94 1128.12,176.02 1151.91,152.23 1233.41,152.23 IC4.10@1235.12,153.94 ; IC5.C16@1195.85,849.42 v2(1211.6,833.67) ; C59.2@1266.69,1584.65 1266.69,1542.64 v1(1278.47,1530.86) ; v1(1384.84,1829.72) 1385.94,1830.83 C49.2@1411.69,1830.83 ; C54.2@1411.69,1519.65 C51.2@1411.69,1470.83 1426.05,1485.18 IC6.12@1480.65,1485.18 1536.47,1485.18 1573.82,1447.84 v1(1573.82,1428.15) ; v1(1464.57,763.78) 1460.75,759.96 C242.2@1460.75,705.24 1460.75,656.38 v1(1470.47,646.65) ; v1(1528.54,1835.63) 1537.28,1844.37 C48.2@1537.28,1880.24 ; C58.2@1542.28,955.24 1577.28,955.24 v1(1577.76,955.71) ; v1@1892.72,1002.84 1902.61,1012.74 IC6.28@1943.64,1012.74 ; IC6.41@1943.64,1422.19 1997.2,1422.19 C47.2@2008.65,1433.64 ; IC6.46@1943.64,1579.67 1986.68,1579.67 C55.2@2008.65,1601.64
  Top Layer w12: IC14.PAD@-764.76,1780.51 -764.76,1767.72 -718.04,1720.99 IC14.9@-668.42,1720.99
  Top Layer w32: C176.2@-117.13,1836.61 -22.64,1836.61 -12.8,1826.77 -12.8,1748.92 -19.64,1742.08 -111.27,1742.08 C176.2@-111.27,1836.12
  MidLayer1 w8: v1@503.94,654.53 v1(511.81,654.53) ; v1@620.08,1807.09 v1(621.34,1805.83) ; v1(739.17,1462.6) v1@739.17,1464.57
  Bottom Layer w8: IC11.13@541.69,1611.46 614.41,1611.46 v1(625,1622.05) ; C32.1@644.84,771.1 652.01,771.1 685.04,804.13 v2@708.66,804.13 ; v1@707.68,566.93 710.91,570.16 IC10.7@744.13,570.16 ; v2@767.72,804.13 v2@770.65,801.2 ; v2(770.65,802.17) v2@770.65,801.2 ; C33.2@783.46,772.64 770.65,785.45 v2@770.65,801.2 ; C21.2@895.43,1211.69 895.43,1242.87 v2@895.67,1243.11 ; v2@929.13,959.65 957.68,931.1 C28.2@959.84,931.1 ; C15.2@971.22,195.14 988.21,178.15 v1(1000,178.15) ; C17.2@972.87,93.43 1005.98,93.43 v1(1006.89,92.52) ; v2@991.14,1084.65 991.14,1065.98 C24.2@1016.02,1041.1 1016.02,992.4 1052.87,992.4 v2(1054.11,991.15) ; v1(995.08,-21.65) 1018.64,-21.65 C19.2@1022.28,-25.3 ; C23.2@1081.02,1076.1 1081.02,1112.52 v2(1085.61,1117.13) ; v1@1277.56,1532.48 1277.56,1559.06 1290.59,1572.09 IC11.38@1321.22,1572.09 1347.68,1572.09 1354.33,1578.74 1354.33,1594.84 1337.71,1611.46 IC11.36@1321.22,1611.46 ; v1(1359.87,1756.59) 1359.87,1756.27 1360.31,1755.83 C46.2@1411.69,1755.83 1431.02,1755.83 1443.84,1768.65 IC7.52@1477.65,1768.65 ; C52.2@1416.69,1545.83 1416.69,1579.72 ; v1(1422.24,1617.12) 1416.69,1611.57 1416.69,1579.72 ; v1(1424.21,1020.67) 1432.14,1012.74 IC7.28@1477.65,1012.74 ; IC7.46@1450.54,1579.67 IC7.46@1477.65,1579.67 1477.6,1579.72 1416.69,1579.72 ; IC7.41@1477.65,1422.19 1498.79,1422.19 1525.75,1449.15 1550.85,1449.15 1571.85,1428.15 v1(1573.82,1428.15) ; IC7.54@1477.65,1831.64 1524.55,1831.64 v1(1528.54,1835.63) ; C42.2@1891.1,965.24 1891.1,999.37 v1(1892.72,1000.98) ; IC7.12@1940.65,1485.18 2003.01,1485.18 C50.2@2005.91,1482.28 ; IC7.6@1940.65,1674.16 1982.34,1674.16 C45.2@2004.92,1651.57 ; C53.2@2005.91,1904.53 2005.91,1903.54 2020,1889.45 C44.2@2020,1825.59
  other v1: 1080.75,-48.23 673.23,520.67 980.31,615.16 562.99,654.53 980.31,666.34 1398.62,740.16 -2667.32,953.74 -2667.32,1032.48 -2667.32,1111.22 -2590.55,1189.96 -2667.32,1191.93 -2669.29,1268.7 -2588.58,1268.7 -2708.66,1347.44
  other v2: 865.14,928.16 896.63,1243.12
  other v3: -1409.45,1764.76 -1366.14,1764.76 -1319.88,1764.76 -1451.77,1765.75 -1454.72,1868.11 -1410.43,1868.11 -1366.14,1868.11 -1320.87,1868.11
GPIO0: IC12.V21 RP8.8
GPIO1: IC12.J19 RP8.7
GPIO2: IC12.W21 RP8.6
GPIO3: IC12.U23 RP8.5
GPIO4: IC12.J15 RP28.8
GPIO5: IC12.V23 RP28.7
GPIO6: IC12.J17 RP28.6
GPIO7: IC12.L21 RP28.5
INTER_SCL: CN2.56 IC16.25 RP24.6
INTER_SDA: CN2.71 IC16.26 RP24.5
IPMB0_A_SCL: CN2.127 IC16.14 RP22.8
IPMB0_A_SDA: CN2.126 IC16.15 RP22.7
IPMB0_B_SCL: CN2.124 IC16.16 RP22.6
IPMB0_B_SDA: CN2.123 IC16.17 RP22.5
IPMBL_SCL0: CN2.121 IC16.35 RP19.8
IPMBL_SCL1: CN2.118 IC16.37 RP19.6
IPMBL_SCL2: CN2.115 IC16.39 RP21.8
IPMBL_SCL3: CN2.112 IC16.41 RP21.6
IPMBL_SCL4: CN2.109 IC16.54 RP23.8
IPMBL_SCL5: CN2.106 IC16.56 RP23.6
IPMBL_SCL6: CN2.103 IC16.58 RP25.8
IPMBL_SCL7: CN2.100 IC16.60 RP25.6
IPMBL_SDA0: CN2.120 IC16.36 RP19.7
IPMBL_SDA1: CN2.117 IC16.38 RP19.5
IPMBL_SDA2: CN2.114 IC16.40 RP21.7
IPMBL_SDA3: CN2.111 IC16.42 RP21.5
IPMBL_SDA4: CN2.108 IC16.55 RP23.7
IPMBL_SDA5: CN2.105 IC16.57 RP23.5
IPMBL_SDA6: CN2.102 IC16.59 RP25.7
IPMBL_SDA7: CN2.99 IC16.61 RP25.5
IUP0_TD0: IC12.AC19 RP4.1
IUP0_TD1: IC12.AD19 RP4.2
IUP0_TD2: IC12.Y17 RP9.3
IUP0_TD3: IC12.Y16 RP10.4
IUP0_TD4: IC12.AE22 RP11.1
IUP0_TD5: IC12.AF22 RP11.2
IUP0_TD6: IC12.AB19 RP13.3
IUP0_TD7: IC12.AB18 RP13.4
IUP0_TD8: IC12.AD25 RP13.1
IUP0_TD9: IC12.AE24 RP13.2
IUP1_TD0: IC12.AG22 RP9.8
IUP1_TD1: IC12.AH22 RP9.7
IUP1_TD2: IC12.AG23 RP10.6
IUP1_TD3: IC12.AH23 RP11.5
IUP1_TD4: IC12.AE19 RP12.8
IUP1_TD5: IC12.AF19 RP12.7
IUP1_TD6: IC12.AF24 RP14.6
IUP1_TD7: IC12.AF25 RP14.5
IUP1_TD8: IC12.AE20 RP14.8
IUP1_TD9: IC12.AF20 RP14.7
IUP_ENABLE0: IC12.AH19 RP12.4
IUP_ENABLE1: IC12.AE18 RP15.4
IUP_LOOPEN0: IC12.AH18 RP10.2
IUP_LOOPEN1: IC12.AG21 RP15.2
IUP_PRBSEN0: IC12.AG18 RP10.1
IUP_PRBSEN1: IC12.AD17 RP15.1
IUP_SFP_DETECT0: CN4.53 IC12.K27
IUP_SFP_DETECT1: CN5.54 IC12.E24
IUP_SFP_LOS0: CN4.51 IC12.D21
IUP_SFP_LOS1: CN5.52 IC12.D23
IUP_SFP_SCL0: IC12.C22 RP16.3
IUP_SFP_SCL1: IC12.C23 RP17.3
IUP_SFP_SDA0: IC12.B21 RP16.2
IUP_SFP_SDA1: IC12.F25 RP17.2
IUP_SFP_TX_DISABLE0: IC12.D22 RP16.1
IUP_SFP_TX_DISABLE1: IC12.G26 RP17.1
IUP_SFP_TX_FAULT0: CN4.55 IC12.C20
IUP_SFP_TX_FAULT1: CN5.56 IC12.F24
IUP_SYNC_PASS0: CN4.64 IC12.AC17
IUP_SYNC_PASS1: CN5.69 IC12.AF18
IUP_SYNCEN0: IC12.AG19 RP12.3
IUP_SYNCEN1: IC12.AH21 RP15.3
IZBT_ADV/LD: IC12.C24 IC17.85
IZBT_CEN: IC12.C25 IC17.87
IZBT_LBO: IC12.AB28 IC17.31
IZBT_OE: IC12.D25 IC17.86
IZBT_RW: IC12.A23 IC17.88
JTAG_TCK: CN5.41 IC12.P8 R51.1 R52.2
JTAG_TDI: IC12.P7 R53.1 R54.2
JTAG_TDO: CN5.39 R55.1 R56.2
JTAG_TDO_M2C: CN5.37 R41.1
JTAG_TMS: CN5.43 IC12.P5 R49.1 R50.2
MAIN_FPGA_DIN: IC12.N7 R45.2
MAIN_NRST: CN1.15 IC4.40 IC16.7 R29.1 R93.2
MCH_UPD_RX: IC12.H19 IC20.5
MCH_UPD_TX: IC12.G18 IC19.5
MCU_RST: IC16.20 R85.2 R94.1
MISO: IC16.13 R89.2 RP18.6
MOSI: IC16.12 R84.2 RP18.8
NetC9_2: C9.2 R12.1 R13.1 | length 120.9
  Top Layer w8: R12.1@1316.22,169.88 v1(1353.94,169.88) R13.1@1386.22,169.88
  Bottom Layer w8: 1312.28,174.96 1317.36,169.88 v1(1353.94,169.88) v1@1348.86,174.96
NetC10_2: C10.2 C11.1 C18.2 CN3.4 CN3.5 IC4.9 L4.1 | length 907.1
  Top Layer w8: v1(1188.98,115.16) 1188.98,119.09 1203.82,133.94 IC4.9@1235.12,133.94 1258.85,133.94 1275.59,150.68 1275.59,271.06 1263.23,283.43
  Bottom Layer w8: C10.2@1191.81,73.87 C10.2@1191.81,76.42 1191.81,112.32 v1(1188.98,115.16) 1188.98,133.58 C18.2@1191.81,136.42
  Bottom Layer w12: L4.1@1081.81,51.64 L4.1@1071.22,62.23 1071.63,62.23 1088.58,45.28 1188.98,45.28 1200.79,57.09 1200.79,67.44 C10.2@1191.81,76.42 ; C10.2@1198.35,69.88 1272.68,69.88 1366.55,-23.98 ; 1354.74,-90.91 1498.1,-90.91 ; 1585.75,-53.27 CN3.5@1635.75,-3.27
NetC12_1: C12.1 C13.2 C16.2 IC4.1 IC4.2 L4.2 | length 422.6
  Top Layer w8: C12.1@1151.34,-201.57 1151.34,-183.31 v1(1187.01,-147.64) ; v1(1184.06,15.75) 1184.06,8.86 1198.98,-6.06 IC4.2@1235.12,-6.06 IC4.1@1235.12,-26.06
  Bottom Layer w8: L4.2@1071.22,7.11 1088.72,24.61 1175.2,24.61 v1(1184.06,15.75) ; v1(1187.01,-147.64) v1@1191.81,-142.83
  Bottom Layer w12: v1@1191.81,-142.83 C13.2@1191.81,-63.58 C16.2@1191.81,-3.58
NetC20_2: C20.2 R15.1 R17.1 | length 105.7
  Top Layer w8: R15.1@1316.22,-42.05 R17.1@1386.22,-42.05
  Bottom Layer w8: 1316.22,-40.12 1350.16,-40.12 v1(1351.38,-41.34)
NetC21_1: C21.1 D20.2 D21.2 IC5.M8 | length 65.4
  Top Layer w8: v2(896.63,1117.13) IC5.M8@912.38,1101.39
  Bottom Layer w8: C21.1@894.69,1159.45 896.63,1157.5 v2(896.63,1117.13)
NetC27_1: C27.1 R31.2 | length 66.2
  Top Layer w8: R31.2@865.43,640.51 925.43,640.51 C27.1@929.84,636.1
NetC29_1: C29.1 IC5.P18 R31.1 | length 167.6
  Top Layer w8: IC5.P18@849.39,786.42 849.39,707.74 R31.1@865.43,691.69 869.84,696.1 C29.1@929.84,696.1
NetC31_1: C31.1 R34.2 | length 66.2
  Top Layer w8: C31.1@530.43,711.69 590.43,711.69 R34.2@594.84,716.1
NetC32_2: C32.2 C33.1 IC5.U17 IC5.V18 L9.2 | length 184.6
  Top Layer w8: IC5.V18@722.44,786.42 IC5.V18@723.41,786.42 IC5.U17@754.9,817.92
  Bottom Layer w8: L9.2@672.99,721.1 680.75,721.1 680.75,725.04 696.85,741.14 696.85,770.28 C32.2@696.02,771.1 737.76,771.1 C33.1@739.17,772.52 ; v2(739.15,802.17) v2@740.16,803.15 ; C33.1@739.84,771.1 739.84,799.88 v2@740.16,800.2
NetC34_1: C34.1 IC5.U18 R34.1 | length 209
  Top Layer w8: C34.1@646.02,656.1 R34.1@646.02,716.1 675,745.08 732.28,745.08 754.9,767.7 IC5.U18@754.9,786.42
NetC36_1: C36.1 IC5.R18 X1.1 | length 369.4
  Top Layer w8: IC5.R18@817.89,786.42 817.89,769.7 763.78,715.59 763.78,571.85 805.43,530.2 X1.1@805.43,521.1 816.02,510.51 C36.1@865.43,510.51
NetC38_1: C38.1 IC5.T18 X1.3 | length 280.4
  Top Layer w5: IC5.T18@787.4,786.42 IC5.T18@787.4,788.39
  Top Layer w8: C38.1@650.43,591.69 650.59,591.54 696.85,591.54 710.94,605.63 X1.3@710.94,678.58 710.94,692.24 786.4,767.7 IC5.T18@786.4,786.42
NetC40_1: C40.1 IC5.R1 X2.2 | length 179.6
  Top Layer w5: C40.1@711.69,1404.65 712.28,1405.24 779.45,1405.24 785.06,1399.63 806.01,1399.63 817.91,1387.72 817.91,1385.83 IC5.R1@817.89,1321.86
NetC41_1: C41.1 IC5.P1 X2.1 | length 152.5
  Top Layer w5: IC5.P1@849.39,1321.86 875.91,1348.37 875.91,1405.24 926.1,1405.24 C41.1@931.69,1399.65
NetC61_DP0_1: C61_DP0.1 IC23_DP0.34 R39_DP0.2
NetC61_DP1_1: C61_DP1.1 IC23_DP1.34 R39_DP1.2
NetC61_DP2_1: C61_DP2.1 IC23_DP2.34 R39_DP2.2
NetC61_DP3_1: C61_DP3.1 IC23_DP3.34 R39_DP3.2
NetC61_DP4_1: C61_DP4.1 IC23_DP4.34 R39_DP4.2
NetC61_DP5_1: C61_DP5.1 IC23_DP5.34 R39_DP5.2
NetC61_DP6_1: C61_DP6.1 IC23_DP6.34 R39_DP6.2
NetC61_DP7_1: C61_DP7.1 IC23_DP7.34 R39_DP7.2
NetC62_DP0_1: C62_DP0.1 IC23_DP0.33 R40_DP0.2
NetC62_DP1_1: C62_DP1.1 IC23_DP1.33 R40_DP1.2
NetC62_DP2_1: C62_DP2.1 IC23_DP2.33 R40_DP2.2
NetC62_DP3_1: C62_DP3.1 IC23_DP3.33 R40_DP3.2
NetC62_DP4_1: C62_DP4.1 IC23_DP4.33 R40_DP4.2
NetC62_DP5_1: C62_DP5.1 IC23_DP5.33 R40_DP5.2
NetC62_DP6_1: C62_DP6.1 IC23_DP6.33 R40_DP6.2
NetC62_DP7_1: C62_DP7.1 IC23_DP7.33 R40_DP7.2
NetC63_DP0_2: C63_DP0.2 C64_DP0.2 R39_DP0.1 R40_DP0.1
NetC63_DP1_2: C63_DP1.2 C64_DP1.2 R39_DP1.1 R40_DP1.1
NetC63_DP2_2: C63_DP2.2 C64_DP2.2 R39_DP2.1 R40_DP2.1
NetC63_DP3_2: C63_DP3.2 C64_DP3.2 R39_DP3.1 R40_DP3.1
NetC63_DP4_2: C63_DP4.2 C64_DP4.2 R39_DP4.1 R40_DP4.1
NetC63_DP5_2: C63_DP5.2 C64_DP5.2 R39_DP5.1 R40_DP5.1
NetC63_DP6_2: C63_DP6.2 C64_DP6.2 R39_DP6.1 R40_DP6.1
NetC63_DP7_2: C63_DP7.2 C64_DP7.2 R39_DP7.1 R40_DP7.1
NetC108_DP0_1: C108_DP0.1 IC23_DP0.38
NetC108_DP1_1: C108_DP1.1 IC23_DP1.38
NetC108_DP2_1: C108_DP2.1 IC23_DP2.38
NetC108_DP3_1: C108_DP3.1 IC23_DP3.38
NetC108_DP4_1: C108_DP4.1 IC23_DP4.38
NetC108_DP5_1: C108_DP5.1 IC23_DP5.38
NetC108_DP6_1: C108_DP6.1 IC23_DP6.38
NetC108_DP7_1: C108_DP7.1 IC23_DP7.38
NetC109_DP0_1: C109_DP0.1 IC23_DP0.39
NetC109_DP1_1: C109_DP1.1 IC23_DP1.39
NetC109_DP2_1: C109_DP2.1 IC23_DP2.39
NetC109_DP3_1: C109_DP3.1 IC23_DP3.39
NetC109_DP4_1: C109_DP4.1 IC23_DP4.39
NetC109_DP5_1: C109_DP5.1 IC23_DP5.39
NetC109_DP6_1: C109_DP6.1 IC23_DP6.39
NetC109_DP7_1: C109_DP7.1 IC23_DP7.39
NetC124_DP0_2: C124_DP0.2 C125_DP0.2 IC23_DP0.36 L5_DP0.2
NetC124_DP1_2: C124_DP1.2 C125_DP1.2 IC23_DP1.36 L5_DP1.2
NetC124_DP2_2: C124_DP2.2 C125_DP2.2 IC23_DP2.36 L5_DP2.2
NetC124_DP3_2: C124_DP3.2 C125_DP3.2 IC23_DP3.36 L5_DP3.2
NetC124_DP4_2: C124_DP4.2 C125_DP4.2 IC23_DP4.36 L5_DP4.2
NetC124_DP5_2: C124_DP5.2 C125_DP5.2 IC23_DP5.36 L5_DP5.2
NetC124_DP6_2: C124_DP6.2 C125_DP6.2 IC23_DP6.36 L5_DP6.2
NetC124_DP7_2: C124_DP7.2 C125_DP7.2 IC23_DP7.36 L5_DP7.2
NetC166_1: C166.1 IC14.16 R58.2 | length 123.1
  Top Layer w12: R58.2@-735.24,1957.68 -675.42,1957.68 -666.45,1948.71 -668.42,1948.71 IC14.16@-668.42,1900.13
NetC180_2: C180.2 IC14.3 | length 120.7
  Top Layer w10: IC14.3@-888.89,1848.94 -852.83,1848.94 v4(-844.49,1857.28)
  Bottom Layer w10: C180.2@-905.51,1885.83 -873.03,1885.83 v4(-844.49,1857.28)
NetC181_2: C181.2 IC13.14 R60.1
NetC182_1: C182.1 IC14.14 | length 100.1
  Top Layer w10: IC14.14@-668.42,1848.94 -627.49,1848.94 C182.1@-585.63,1807.09
NetC182_2: C182.2 D14.2 IC14.12 L1.1 Q1.1 Q1.2 Q1.3 Q2.5 Q2.6 Q2.7 Q2.8 | length 162.1
  Top Layer w10: IC14.12@-668.42,1797.76 -628.47,1797.76 -606.3,1775.59 -560.04,1775.59 C182.2@-528.54,1807.09
NetC188_2: C188.2 R66.1
NetC189_2: C189.2 IC14.6 | length 146.2
  Top Layer w10: IC14.6@-888.89,1772.17 -855.78,1772.17 v4(-845.47,1782.48)
  Bottom Layer w10: C189.2@-922.24,1748.03 -867.13,1748.03 -860.24,1754.92 -845.47,1769.68 v4(-845.47,1782.48)
NetC190_1: C190.1 IC14.11 | length 106.3
  Top Layer w10: IC14.11@-668.42,1772.17 -634.38,1772.17 -613.19,1750.98 -571.85,1750.98 C190.1@-571.85,1750
NetC191_2: C191.2 IC13.1
NetC192_2: C192.2 IC13.13
NetC193_1: C193.1 C194.1 C195.1 IC14.7 R70.2 R71.1 | length 1001.9
  Top Layer w10: C195.1@-954,1674.46 -954,1708.4 -930.12,1732.28 -930.12,1739.17 ; -929.13,1740.16 -922.71,1746.58 IC14.7@-888.89,1746.58 ; IC14.7@-890.75,1747.05 -847.44,1747.05 -797.24,1696.85 -692.39,1696.85 C193.1@-650.54,1655 ; C193.1@-648.62,1657.48 -647.64,1656.5 -622.05,1656.5 v4@-616.14,1650.59
  Bottom Layer w10: R71.1@-915.54,1675 -854.53,1675 v4@-816.93,1712.6 ; v4@-614.17,1647.64 -556.1,1589.57 C194.1@-356.3,1589.57 ; C194.1@-359.46,1601 -302,1658.46 R70.2@-208.66,1658.46
  other v4: -617.13,1649.61 -814.96,1714.57
NetC193_2: C193.2 R69.2 | length 58.4
  Top Layer w10: R69.2@-783.54,1655 -725.91,1655 C193.2@-725.39,1655.51
NetC194_2: C194.2 R67.2 | length 78.1
  Bottom Layer w10: C194.2@-292.54,1601 -214.94,1601 R67.2@-214.57,1601.38
NetC195_2: C195.2 IC14.8 R69.1 | length 213.3
  Top Layer w10: C195.2@-954,1607.54 -917.07,1607.54 -875,1649.61 R69.1@-875,1648.62 ; IC14.8@-888.89,1720.99 -858.79,1720.99 -851.38,1713.58 R69.1@-851.38,1655.51 ; R69.1@-858.4,1662.54 R69.1@-851.38,1655.51 ; R69.1@-851.38,1650.59 R69.1@-851.38,1655.51 ; R69.1@-850.39,1654.53 R69.1@-851.38,1655.51
  Top Layer w12: R69.1@-877.95,1648.62 R69.1@-877.95,1649.61
NetC196_1: C196.1 IC15.16 R72.2
NetC206_2: C206.2 IC15.3
NetC212_1: C212.1 IC15.14
NetC212_2: C212.2 D18.2 IC15.12 L2.1 Q3.1 Q3.2 Q3.3 Q4.5 Q4.6 Q4.7 Q4.8
NetC216_2: C216.2 IC15.6
NetC217_1: C217.1 IC15.11
NetC218_1: C218.1 C219.1 C220.1 IC15.7 R81.2 R83.1
NetC218_2: C218.2 R80.2
NetC219_2: C219.2 R77.2
NetC220_2: C220.2 IC15.8 R80.1
NetCN1_3: CN1.3 R30.1
NetCN1_5: CN1.5 IC5.P17 RP26.2
NetCN1_7: CN1.7 IC5.N17 RP26.3
NetCN1_9: CN1.9 IC5.R17
NetCN1_11: CN1.11 IC5.U15 RP26.4
NetCN1_13: CN1.13 IC5.N18
NetCN2_3: CN2.3 D13.1
NetCN2_83: CN2.83 D13.2
NetCN3_1: CN3.1 IC4.7 R12.2 | length 298
  Top Layer w8: IC4.7@1238.62,93.94 IC4.7@1235.12,93.94 R12.2@1307.2,93.94 ; R12.2@1316.22,102.95 1339.96,102.95 1349.27,93.65 1349.27,80.57 1357.54,72.3 1392.87,72.3 1396.63,68.54 1415.02,68.54 ; 1534.05,-203.27 CN3.1@1635.75,-203.27
NetCN3_2: CN3.2 IC4.8 R13.2 | length 215
  Top Layer w8: IC4.8@1235.12,113.94 1258.85,113.94 1278.52,133.61 1355.57,133.61 R13.2@1386.22,102.95 1407.64,81.54 1420.4,81.54
NetCN3_3: CN3.3 IC4.3 R17.2 | length 456
  Top Layer w8: IC4.3@1235.12,13.94 1267.69,13.94 1287.4,-5.77 1355.57,-5.77 R17.2@1386.22,24.88 ; 1375.71,-42.05 1437.08,-103.42
  Bottom Layer w8: 1439.57,-105.91 1633.1,-105.91 CN3.3@1635.75,-103.27
NetCN3_6: CN3.6 IC4.4 R15.2 | length 298.2
  Top Layer w8: IC4.4@1235.12,33.94 R15.2@1307.17,33.94 ; R15.2@1316.22,24.88 1326.88,24.88 1357.54,55.54 1409.63,55.54
  Bottom Layer w8: 1435.04,0 1481.77,46.73 CN3.6@1535.75,46.73
NetCN3_10: CN3.10 R27.1
NetCN3_11: CN3.11 R26.1
NetCN9_1: CN9.1 R84.1
NetCN9_5: CN9.5 R85.1
NetCN9_7: CN9.7 R88.1
NetCN9_9: CN9.9 R89.1
NetCN10_1: CN10.1 D20.1
NetD1_2: D1.2 RP5.1
NetD2_2: D2.2 RP5.2
NetD3_2: D3.2 RP5.3
NetD4_2: D4.2 RP5.4
NetD5_KG: D5.1 RP6.1 | length 240.1
  Top Layer w5: RP6.1@2149.68,850.47 2149.68,720.21 2215.71,654.19 2232.22,654.19
NetD5_KR: D5.2 RP6.2 | length 167.4
  Top Layer w5: RP6.2@2149.68,870.16 2168.23,870.16 2178.15,860.24 ; 2178.15,859.25 2178.15,788.39 2202.11,764.43 2232.22,764.43
NetD6_KG: D6.1 RP6.3 | length 150.6
  Top Layer w5: RP6.3@2149.68,889.84 2162.69,889.84 2196.85,855.68 2196.85,807.09 2209.75,794.19 D6.1@2232.22,794.19
NetD6_KR: D6.2 RP6.4 | length 84.6
  Top Layer w5: RP6.4@2149.68,909.53 2227.12,909.53 D6.2@2232.22,904.43